# EAGLE board videoPlayer_v1.0 (EAGLE 9.7.0)
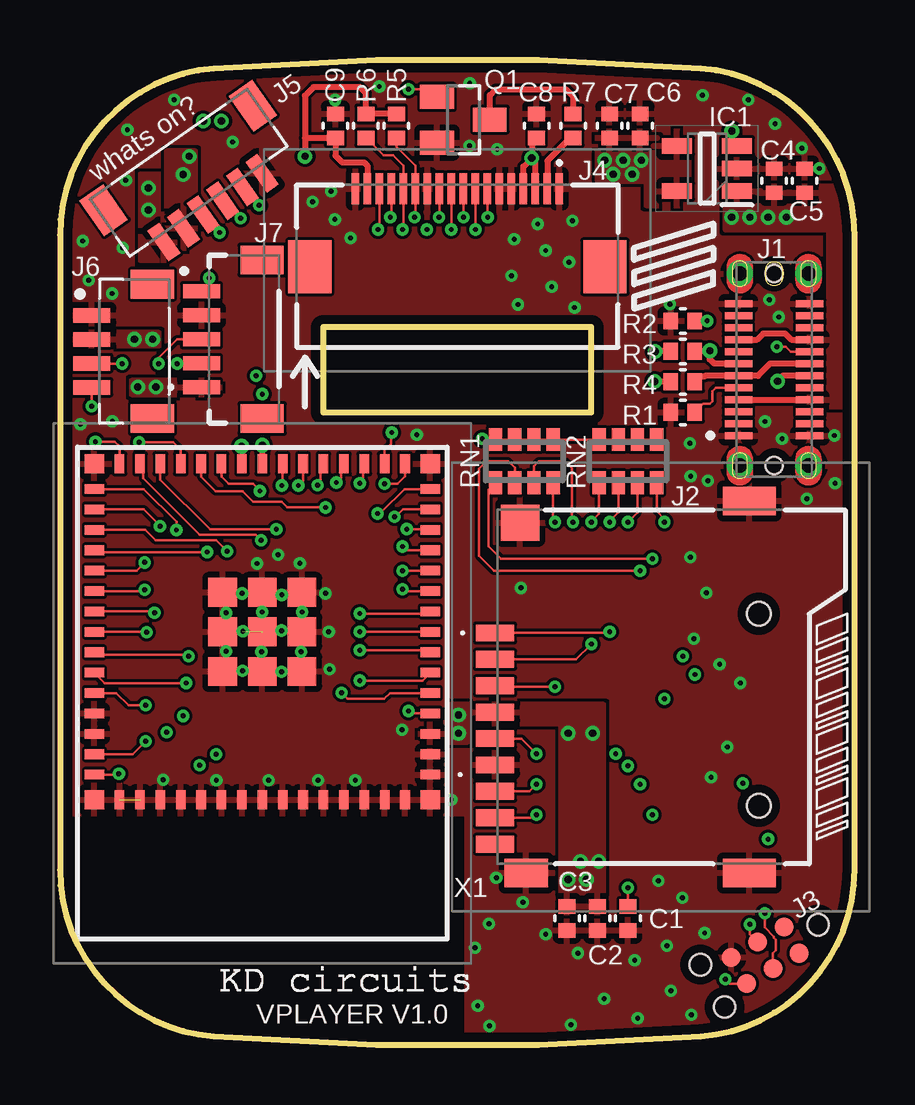
[diagram p0: board, top side]
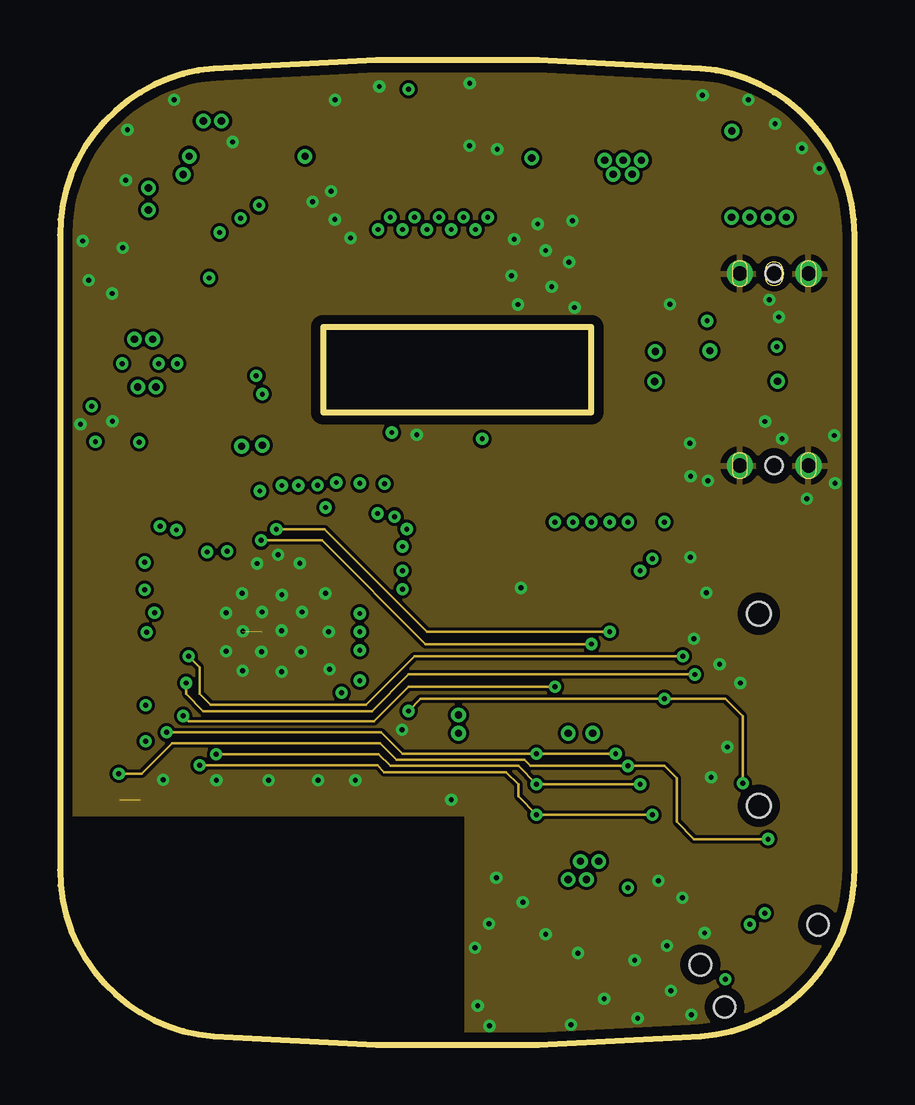
[diagram p1: board, inner layer Route2]
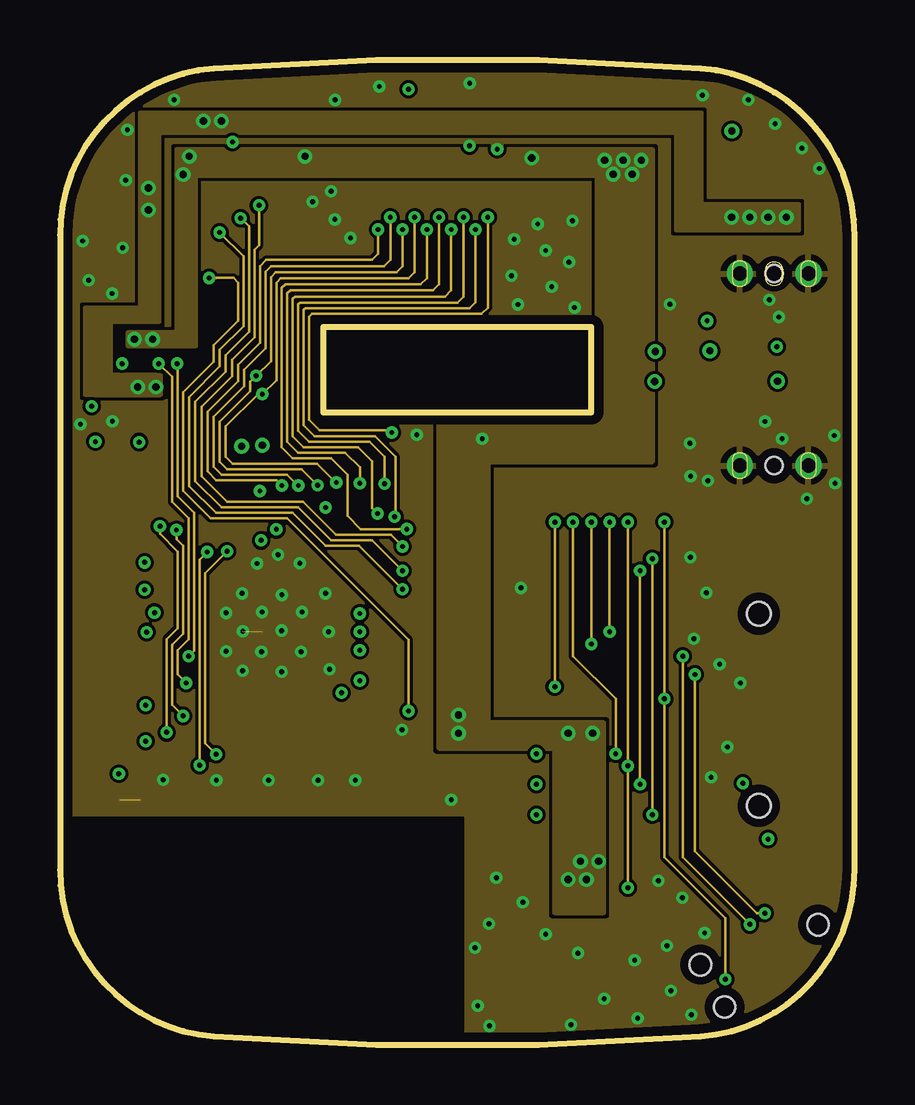
[diagram p2: board, inner layer Route15]
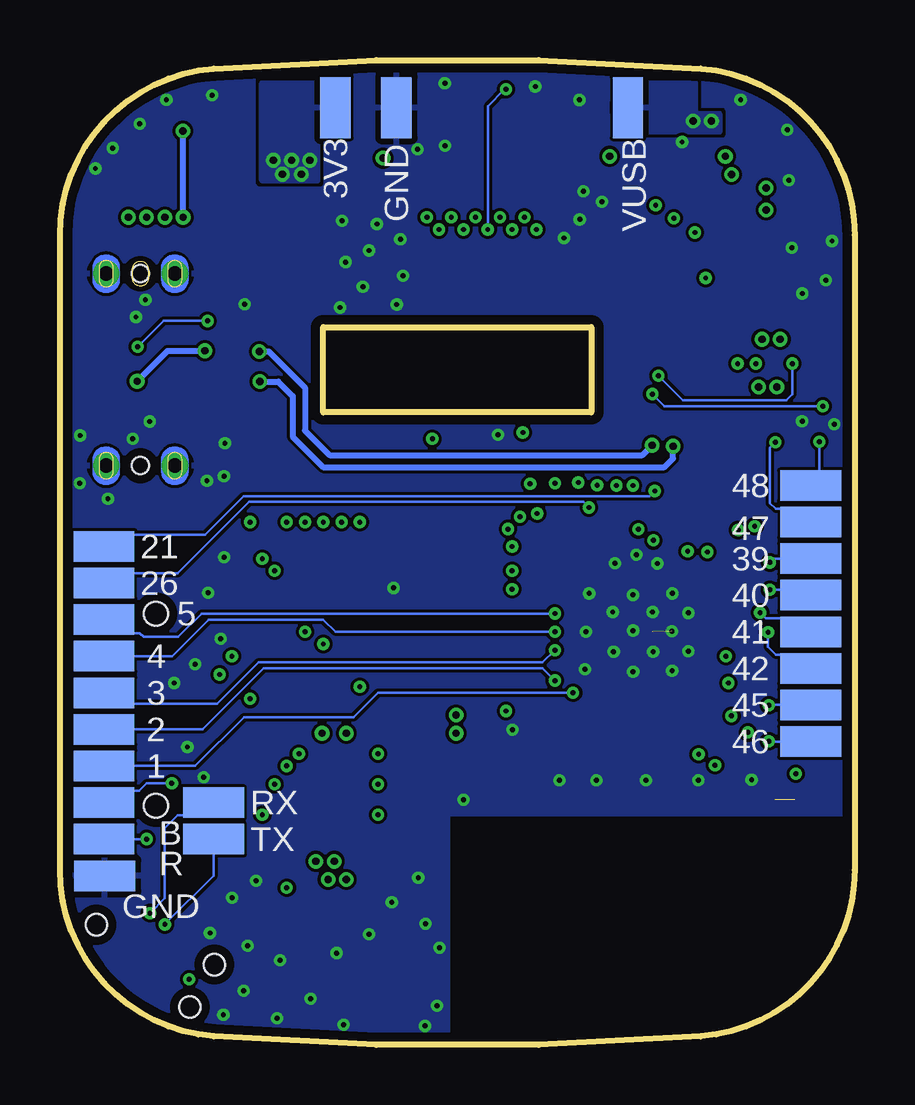
[diagram p3: board, bottom side, seen from below]

Size 33.13 x 41.04 mm. Coordinates in mm from the lower left corner, seen from the top.
Outline: 0,7.3 arc85 6.42,0.36 arc9 26.71,0.36 arc85 33.13,7.3 33.13,33.74 arc85 26.71,40.69 arc9 6.42,40.69 arc85 0,33.74 0,7.3
Copper layers (1+2*15+16): Top 0.035mm / dielectric 0.1mm / Route2 0.035mm / dielectric 0.68mm / Route15 0.014mm / dielectric 0.1mm / Bottom 0.035mm
Design rules "4layer_4mil_0.12mmhole *": minimum track width 4mil, minimum drill 0.2mm, track to track 5mil, track to pad 5mil, pad to pad 5mil, via to via 5mil, smd to smd 0mil, copper to edge 15mil, drill to drill 4mil, minimum pad ring 6mil, minimum via ring 6mil, stop-mask expansion 4mil, vias tented up to drill 100mil, thermal gap 10mil

## Footprints (pad centres in the part's own frame; a part is rotated, then mirrored left to right if it is on the bottom)
0402 = smd 0.6 x 0.7: 1 -0.5,0; 2 0.5,0
SOT94P280X100-5N = smd 1.25 x 0.65: 1 -1.25,0.94; 2 -1.25,0; 3 -1.25,-0.94; 4 1.25,-0.94; 5 1.25,0.94
GCT_USB4160-03-0170-C_REVA2 = smd 0.3 x 1.15: A1 -2.75,1.485; A2 -2.25,1.485; A3 -1.75,1.485; A4 -1.25,1.485; A5 -0.75,1.485; A6 -0.25,1.485; A7 0.25,1.485; A8 0.75,1.485; A9 1.25,1.485; A10 1.75,1.485; A11 2.25,1.485; A12 2.75,1.485; B1 2.75,-1.485; B2 2.25,-1.485; B3 1.75,-1.485; B4 1.25,-1.485; B5 0.75,-1.485; B6 0.25,-1.485; B7 -0.25,-1.485; B8 -0.75,-1.485; B9 -1.25,-1.485; B10 -1.75,-1.485; B11 -2.25,-1.485; B12 -2.75,-1.485 | drill 0.6 pad 1.1: S1 -4,1.43; S2 4,1.43; S3 -4,-1.43; S4 4,-1.43 | hole 0.71: -4,0; 4,0
MSD4A = smd 0.7 x 1.6: 1 2.25,6.9; 2 1.15,6.9; 3 0.05,6.9; 4 -1.05,6.9; 5 -2.15,6.9; 6 -3.25,6.9; 7 -4.35,6.9; 8 -5.45,6.9; CD1 -6.55,6.9 | smd 1.5 x 1.6: G1 6.85,5.85 | smd 1.2 x 2.2: G2 7.75,-3.7; G3 -7.75,-3.7 | smd 1.2 x 1.8: G4 -7.75,5.6 | hole 1: 3.05,-4.1; -4.95,-4.1
TC2030-MCP-NL = smd 0.787 x 0.787: 1 1.27,-0.635; 2 1.27,0.635; 3 2.54,-0.635; 4 2.54,0.635; 5 3.81,-0.635; 6 3.81,0.635 | hole 0.889: 0,0; 5.08,-1.016; 5.08,1.016
FFC2B3518G = smd 0.3 x 1.3: 1 4.25,3.22; 2 3.75,3.22; 3 3.25,3.22; 4 2.75,3.22; 5 2.25,3.22; 6 1.75,3.22; 7 1.25,3.22; 8 0.75,3.22; 9 0.25,3.22; 10 -0.25,3.22; 11 -0.75,3.22; 12 -1.25,3.22; 13 -1.75,3.22; 14 -2.25,3.22; 15 -2.75,3.22; 16 -3.25,3.22; 17 -3.75,3.22; 18 -4.25,3.22 | smd 1.8 x 2.2: MP1 -6.15,-0.03; MP2 6.15,-0.03
JST_BM06B-SRSS-TB(LF)(SN) = smd 0.6 x 1.55: 1 -2.5,-2.525; 2 -1.5,-2.525; 3 -0.5,-2.525; 4 0.5,-2.525; 5 1.5,-2.525; 6 2.5,-2.525 | smd 1.2 x 1.8: S1 -3.8,0; S2 3.8,0
CONN_BM04B-SRSS-TBT(LF)(SN) = smd 0.6 x 1.55: 1 -1.5,0; 2 -0.5,0; 3 0.5,0; 4 1.5,0 | smd 1.2 x 1.8: SH1 -2.8,2.525; SH2 2.8,2.525
BM05BSRSSTBTLFSN = smd 0.6 x 1.55: 1 -2,1.775; 2 -1,1.775; 3 0,1.775; 4 1,1.775; 5 2,1.775 | smd 1.2 x 1.8: MP1 -3.3,-0.75; MP2 3.3,-0.75
SMD1,27-2,54 = smd 1.27 x 2.54: 1 0,0
SOT-23-3 = smd 1 x 1.4: 1 -0.95,-1.1; 2 0.95,-1.1; 3 0,1.1
CAY-16-F4 = smd 0.95 x 0.55: 1 -0.9,-1.2; 2 -0.9,-0.4; 3 -0.9,0.4; 4 -0.9,1.2; 5 0.9,-1.2; 6 0.9,-0.4; 7 0.9,0.4; 8 0.9,1.2
ESP32S3MINI1N8 = smd 0.8 x 0.4: 1 -7,5.95; 2 -7,5.1; 3 -7,4.25; 4 -7,3.4; 5 -7,2.55; 6 -7,1.7; 7 -7,0.85; 8 -7,0; 9 -7,-0.85; 10 -7,-1.7; 11 -7,-2.55; 12 -7,-3.4; 13 -7,-4.25; 14 -7,-5.1; 15 -7,-5.95; 31 7,-5.95; 32 7,-5.1; 33 7,-4.25; 34 7,-3.4; 35 7,-2.55; 36 7,-1.7; 37 7,-0.85; 38 7,0; 39 7,0.85; 40 7,1.7; 41 7,2.55; 42 7,3.4; 43 7,4.25; 44 7,5.1; 45 7,5.95 | smd 0.4 x 0.8: 16 -5.95,-7; 17 -5.1,-7; 18 -4.25,-7; 19 -3.4,-7; 20 -2.55,-7; 21 -1.7,-7; 22 -0.85,-7; 23 0,-7; 24 0.85,-7; 25 1.7,-7; 26 2.55,-7; 27 3.4,-7; 28 4.25,-7; 29 5.1,-7; 30 5.95,-7; 46 5.95,7; 47 5.1,7; 48 4.25,7; 49 3.4,7; 50 2.55,7; 51 1.7,7; 52 0.85,7; 53 0,7; 54 -0.85,7; 55 -1.7,7; 56 -2.55,7; 57 -3.4,7; 58 -4.25,7; 59 -5.1,7; 60 -5.95,7 | smd 1.2 x 1.2: 61 0,0; 66 -1.65,1.65; 67 -1.65,0; 68 -1.65,-1.65; 69 0,-1.65; 70 1.65,-1.65; 71 1.65,0; 72 1.65,1.65; 73 0,1.65 | smd 0.8 x 0.8: 62 -7,7; 63 -7,-7; 64 7,-7; 65 7,7

## Placement (x,y rotation side)
C1  100nF  [0402]  23.68,5.28 90 top
C2  10uF  [0402]  22.41,5.28 90 top
C3  22uF  [0402]  21.14,5.28 90 top
C4  10uF  [0402]  29.77,36.01 270 top
C5  100nF  [0402]  31.04,36.01 270 top
C6  10uF  [0402]  24.19,38.3 270 top
C7  100nF  [0402]  22.91,38.3 270 top
C8  10uF  [0402]  19.87,38.3 270 top
C9  10uF  [0402]  11.49,38.3 270 top
IC1  RT9080-33GJ5  [SOT94P280X100-5N]  26.98,36.52 180 top
J1  USB4160-03-0170-C  [GCT_USB4160-03-0170-C_REVA2]  29.77,28.14 90 top
J2  MSD-4-A  [MSD4A]  25.04,14.92 90 top
J3  [TC2030-MCP-NL]  31.6,5.01 210 top
J4  FFC2B35-18-G  [FFC2B3518G]  16.57,32.46 0 top
J5  BM06B-SRSS-TB  [JST_BM06B-SRSS-TB(LF)(SN)]  4.93,36.96 35 top
J6  BM04B-SRSS-TB  [CONN_BM04B-SRSS-TBT(LF)(SN)]  1.33,28.9 270 top
J7  BM05B-SRSS-TBT  [BM05BSRSSTBTLFSN]  7.68,29.41 90 top
PAD1  [SMD1,27-2,54]  31.3,11.63 90 bottom
PAD2  [SMD1,27-2,54]  31.3,13.15 90 bottom
PAD3  [SMD1,27-2,54]  31.3,14.68 270 bottom
PAD4  [SMD1,27-2,54]  31.3,16.2 270 bottom
PAD5  [SMD1,27-2,54]  31.3,17.72 270 bottom
PAD6  [SMD1,27-2,54]  31.3,20.77 270 bottom
PAD7  [SMD1,27-2,54]  31.3,19.25 270 bottom
PAD8  [SMD1,27-2,54]  1.83,20.26 270 bottom
PAD9  [SMD1,27-2,54]  1.83,18.74 270 bottom
PAD10  [SMD1,27-2,54]  1.83,17.22 270 bottom
PAD11  [SMD1,27-2,54]  1.83,15.69 270 bottom
PAD12  [SMD1,27-2,54]  1.83,14.17 270 bottom
PAD13  [SMD1,27-2,54]  1.83,12.64 270 bottom
PAD14  [SMD1,27-2,54]  1.83,21.79 270 bottom
PAD15  [SMD1,27-2,54]  1.83,23.31 270 bottom
PAD16  [SMD1,27-2,54]  19.11,39.06 180 bottom
PAD17  [SMD1,27-2,54]  21.65,39.06 0 bottom
PAD18  [SMD1,27-2,54]  9.45,39.06 0 bottom
PAD19  [SMD1,27-2,54]  31.3,10.1 270 bottom
PAD20  [SMD1,27-2,54]  31.3,8.58 270 bottom
PAD21  [SMD1,27-2,54]  26.73,10.1 270 bottom
PAD22  [SMD1,27-2,54]  26.73,8.58 270 bottom
PAD23  [SMD1,27-2,54]  31.26,7.04 270 bottom
Q1  2N7002K-7  [SOT-23-3]  16.82,38.55 270 top
R1  5.1k  [0402]  25.96,26.36 180 top
R2  5.1k  [0402]  25.96,30.17 180 top
R3  33  [0402]  25.96,28.9 180 top
R4  33  [0402]  25.96,27.63 180 top
R5  10k  [0402]  14.03,38.3 270 top
R6  10k  [0402]  12.76,38.3 270 top
R7  10  [0402]  21.39,38.3 90 top
RN1  10k  [CAY-16-F4]  19.36,24.33 90 top
RN2  10k  [CAY-16-F4]  23.68,24.33 90 top
X1  ESP32-S3-MINI-1-N4R2  [ESP32S3MINI1N8]  8.44,17.22 180 top

## Library data of the parts
C1 C5 C7 = trigBoardV8; DESCRIPTION: CAP CER 0.1UF 16V X7R 0402; FOOTPRINT: 0402; MANUFACTURER_PART_NUMBER: CC0402KRX7R7BB104; SUPPLIER: Digikey; SUPPLIER_PART_NUMBER: 311-1338-1-ND
C2 C4 C6 C8 C9 = trigBoardV8; DESCRIPTION: CAP CER 10UF 6.3V X5R 0402; FOOTPRINT: 0402; MANUFACTURER_PART_NUMBER: GRJ155R60J106ME11D; SUPPLIER: Digikey; SUPPLIER_PART_NUMBER: 490-13211-1-ND
C3 = trigBoardV8; DESCRIPTION: CAP CER 22UF 4V X5R 0402; FOOTPRINT: 0402; MANUFACTURER_PART_NUMBER: CM05X5R226M04AH; SUPPLIER: Digikey; SUPPLIER_PART_NUMBER: 478-CM05X5R226M04AHCT-ND
IC1 = trigBoardV8; DESCRIPTION: IC REG LIN 3.3V 600MA TSOT23-5; FOOTPRINT: TSOT23; MANUFACTURER_PART_NUMBER: RT9080-33GJ5; SUPPLIER: Digikey; SUPPLIER_PART_NUMBER: 1028-1509-1-ND
J1 = trigBoardV8; DESCRIPTION: USB 3.2 TYPE-C RECPT VERT SMT 1.; FOOTPRINT: SMD; MANUFACTURER_PART_NUMBER: USB4160-03-0170-C; SUPPLIER: Digikey; SUPPLIER_PART_NUMBER: 2073-USB4160-03-0170-CCT-ND
J2 = trigBoardV8; DESCRIPTION: MICRO SD CARD CONNECTOR, 9 POSIT; FOOTPRINT: SMD; MANUFACTURER_PART_NUMBER: MSD-4-A; SUPPLIER: Digikry; SUPPLIER_PART_NUMBER: 2223-MSD-4-ACT-ND
J3 PAD1-PAD23 = trigBoardV8
J4 = trigBoardV8; DESCRIPTION: CONN FFC BOTTOM 18POS 0.5MM R/A; FOOTPRINT: SMD; MANUFACTURER_PART_NUMBER: FFC2B35-18-G; SUPPLIER: DIGIKEY; SUPPLIER_PART_NUMBER: 2073-FFC2B35-18-GCT-ND
J5 = trigBoardV8; DESCRIPTION: CONN HEADER SMD 6POS 1MM; FOOTPRINT: SMD; MANUFACTURER_PART_NUMBER: BM06B-SRSS-TB; SUPPLIER: Digikey; SUPPLIER_PART_NUMBER: 455-BM06B-SRSS-TBCT-ND
J6 = trigBoardV8; DESCRIPTION: CONN HEADER SMD 4POS 1MM; FOOTPRINT: SMD; MANUFACTURER_PART_NUMBER: BM04B-SRSS-TB; SUPPLIER: Digikey; SUPPLIER_PART_NUMBER: 455-BM04B-SRSS-TBCT-ND
J7 = trigBoardV8; DESCRIPTION: CONN HEADER SMD 5POS 1MM; FOOTPRINT: SMT; MANUFACTURER_PART_NUMBER: BM05B-SRSS-TBT(LF)(SN); SUPPLIER: Digikey; SUPPLIER_PART_NUMBER: 455-2958-1-ND
Q1 = trigBoardV8; DESCRIPTION: MOSFET N-CH 60V 0.38A SOT23-3; FOOTPRINT: SOT23; MANUFACTURER_PART_NUMBER: 2N7002K-7; SUPPLIER: Digikey; SUPPLIER_PART_NUMBER: 2N7002K-7DICT-ND
R1 R2 = trigBoardV8; DESCRIPTION: RES 5.1K OHM 1% 1/16W 0402; FOOTPRINT: 0402; MANUFACTURER_PART_NUMBER: RC0402FR-075K1L; SUPPLIER: Digikey; SUPPLIER_PART_NUMBER: 311-5.10KLRCT-ND
R3 R4 = trigBoardV8; DESCRIPTION: RES 33 OHM 1% 1/16W 0402; FOOTPRINT: 0402; MANUFACTURER_PART_NUMBER: RC0402FR-0733RL; SUPPLIER: Digikey; SUPPLIER_PART_NUMBER: 311-33.0LRCT-ND
R5 R6 = trigBoardV8; DESCRIPTION: RES SMD 10K OHM 1% 1/16W 0402; FOOTPRINT: 0402; MANUFACTURER_PART_NUMBER: RC1005F103CS; SUPPLIER: Digikiey; SUPPLIER_PART_NUMBER: 1276-3431-1-ND
R7 = trigBoardV8; DESCRIPTION: RES SMD 10 OHM 1% 1/16W 0402; FOOTPRINT: 0402; MANUFACTURER_PART_NUMBER: CR0402-FX-10R0GLF; SUPPLIER: Digikey; SUPPLIER_PART_NUMBER: CR0402-FX-10R0GLFCT-ND
RN1 RN2 = trigBoardV8; DESCRIPTION: RES ARRAY 4 RES 10K OHM 1206; FOOTPRINT: 1206; MANUFACTURER_PART_NUMBER: CAY16-1002F4LF; SUPPLIER: Digikey; SUPPLIER_PART_NUMBER: CAY16-1002F4LFCT-ND
X1 = trigBoardV8; DESCRIPTION: Blluetooth LE MCU Mod; FOOTPRINT: SMD; MANUFACTURER_PART_NUMBER: ESP32-S3-MINI-1-N4R2; SUPPLIER: Digikey; SUPPLIER_PART_NUMBER: 1965-ESP32-S3-MINI-1-N4R2CT-ND

## Nets
2: J3.2
3V3: C2.2 C3.2 C6.2 C7.2 C8.2 C9.2 IC1.4 IC1.5 J2.4 J4.3 J4.4 J4.17 J5.2 J6.2 PAD17.1 R5.1 R6.1 RN1.5 RN1.6 RN1.7 RN1.8 RN2.5 RN2.6 RN2.7 RN2.8 X1.3
BOOT: J3.6 J7.5 PAD19.1 RN2.1 X1.4
GND: C1.1 C2.1 C3.1 C4.1 C5.1 C6.1 C7.1 C8.1 C9.1 IC1.2 J1.A1 J1.A12 J1.B1 J1.B12 J1.S1 J1.S2 J1.S3 J1.S4 J2.6 J2.G1 J2.G2 J2.G3 J2.G4 J3.5 J4.1 J4.5 J4.6 J4.12 J4.18 J5.6 J6.1 J7.4 PAD16.1 PAD23.1 Q1.2 R1.2 R2.2 X1.1 X1.2 X1.42 X1.43 X1.46 X1.47 X1.48 X1.49 X1.50 X1.51 X1.52 X1.53 X1.54 X1.55 X1.56 X1.57 X1.58 X1.59 X1.60 X1.61 X1.62 X1.63 X1.64 X1.65 X1.66 X1.67 X1.68 X1.69 X1.70 X1.71 X1.72 X1.73
I2C_SCL: J4.13 J6.4 R5.2 X1.19
I2C_SDA: J4.14 J6.3 R6.2 X1.20
I2S_BCLK: J5.3 X1.10
I2S_DOUT: J5.5 X1.12
I2S_LRC: J5.4 X1.11
IO1: PAD1.1 X1.5
IO2: PAD2.1 X1.6
IO3: PAD3.1 X1.7
IO4: PAD4.1 X1.8
IO5: PAD5.1 X1.9
IO21: PAD6.1 X1.25
IO26: PAD7.1 X1.26
IO39: PAD8.1 X1.35
IO40: PAD9.1 X1.36
IO41: PAD10.1 X1.37
IO42: PAD11.1 X1.38
IO45: PAD12.1 X1.41
IO46: PAD13.1 X1.44
IO47: PAD14.1 X1.27
IO48: PAD15.1 X1.30
LCD_CS: J4.8 X1.14
LCD_DC: J4.7 X1.17
LCD_LIGHT: Q1.1 X1.13
LCD_MOSI: J4.10 X1.15
LCD_RESET: J4.11 X1.18
LCD_SCK: J4.9 X1.16
N$1: R3.2 X1.23
N$3: R4.2 X1.24
N$4: Q1.3 R7.2
N$5: J4.2 R7.1
N$12: J1.B5 R2.1
N$13: J1.A5 R1.1
RESET: C1.2 PAD20.1 RN2.2 X1.45
SD_CLK: J2.5 RN1.2 X1.32
SD_CMD: J2.3 RN1.1 X1.31
SD_D0: J2.7 RN1.3 X1.33
SD_D1: J2.8 RN1.4 X1.34
SD_D2: J2.1 RN2.3 X1.28
SD_D3: J2.2 RN2.4 X1.29
TOUCH_INT: J4.16 X1.22
TOUCH_RESET: J4.15 X1.21
UART_RX: J3.4 J7.3 PAD21.1 X1.40
UART_TX: J3.3 J7.2 PAD22.1 X1.39
USB_N: J1.A7 J1.B7 R3.1
USB_P: J1.A6 J1.B6 R4.1
VUSB: C4.2 C5.2 IC1.1 IC1.3 J1.A4 J1.A9 J1.B4 J1.B9 J5.1 J7.1 PAD18.1

## Tracks (layer width: path | path; a pad name or v marks a point on that pad's centre or on a via)
3V3  (via drill 0.2, 0.3)
  Top 0.102: RN2.5 RN2.6 RN2.7 RN2.8 RN1.5 RN1.6 RN1.7 RN1.8 17.61,25.23 v17.61,25.25
  Top 0.254: R5.1 R6.1 12.76,39.66 12.5,39.91 10.57,39.91 10.22,39.55 10.22,37.79 | 10.22,37.79 v10.22,37.03 | 10.22,37.79 C9.2 11.49,37.05 11.76,36.77 12.68,36.77 12.82,36.64 J4.17 | J4.3 19.82,36.8 v19.66,36.95 | C8.2 19.68,37.61 19.68,36.96 v19.66,36.95 | J4.4 19.32,36.6 v19.66,36.95
  other vias: 24.24,36.86 23.47,36.86 22.71,36.86 23.07,36.28 23.85,36.28 3.87,29.41 3.1,29.41 5.39,37.03 5.14,36.27 16.62,12.99 16.62,13.75 21.19,12.99 22.2,12.99 21.19,6.89 21.95,6.89 22.46,7.65 21.7,7.65
  pour Top: 24.42,35.96 24.44,35.91 24.44,35 26.22,35 26.22,38.04 22.41,38.04 22.41,36.01 24.34,36.01 24.38,35.99
  pour Route15: 20.61,12.33 20.63,12.29 20.63,5.53 22.66,5.53 22.66,13.41 17.94,13.41 17.89,13.42 17.85,13.46 17.84,13.51 17.84,24.23 17.85,24.27 17.89,24.31 17.94,24.33 24.69,24.33 24.69,37.28 4.88,37.28 4.88,29.76 4.86,29.72 4.83,29.68 4.78,29.66 2.85,29.66 2.85,29.15 5.64,29.15 5.64,36.16 5.66,36.21 5.7,36.25 5.74,36.27 22.31,36.27 22.35,36.25 22.39,36.21 22.41,36.16 22.41,25.95 22.39,25.91 22.35,25.87 22.31,25.85 15.8,25.85 15.8,12.39 20.53,12.39 20.57,12.37
  pour Top: 0.56,29.15 4.12,29.15 4.12,29.67 0.56,29.67
  pour Top: 4.45,33.22 5.64,33.22 5.64,37.23 4.45,37.23
  pour Top: 20.86,13.35 20.88,13.3 20.88,5.53 22.66,5.53 22.66,14.17 16.27,14.17 16.27,13.51 16.25,13.46 16.22,13.42 16.17,13.41 15.04,13.41 15.04,12.64 17.01,12.64 17.01,13.3 17.03,13.35 17.06,13.39 17.11,13.41 20.78,13.41 20.83,13.39
  pour Bottom: 22.39,37.99 22.41,37.94 22.41,36.01 24.69,36.01 24.69,40.08 21.39,40.08 21.39,38.04 22.31,38.04 22.35,38.02
BOOT  (via drill 0.2)
  Top 0.102: J7.5 6.21,31.72 v6.21,31.96 | X1.4 14.63,13.82 v14.53,13.91 | J3.6 27.93,2.55 v27.74,2.74 | v25.2,21.79 25.2,21.91 24.88,22.23 RN2.1
  Route2 0.102: v14.53,13.91 15.04,14.42 v25.2,14.42 27.74,14.42 28.47,13.7 v28.47,10.9
  Route15 0.102: v6.21,31.96 7.23,31.96 7.42,31.77 7.42,30.17 6.41,29.15 6.41,28.47 5.14,27.2 5.14,23.08 6.28,21.94 9.48,21.94 14.53,16.89 v14.53,13.91 | v27.74,2.74 27.74,5.28 25.2,7.82 v25.2,14.42 v25.2,21.79
  Bottom 0.102: PAD19.1 30.8,10.6 29.82,10.6 29.52,10.9 28.54,10.9 28.5,10.87 v28.47,10.9
GND  (via drill 0.2)  (2 unrouted)
  other vias: 11.47,39.38 17.09,40.08 10.53,35.14 11.46,34.4 12.12,33.62 18.94,33.57 17.07,37.47 18.23,37.32 19.92,34.21 21.37,34.35 20.25,33.1 18.83,32.05 20.5,31.59 21.23,32.62 19.09,30.86 21.45,30.73 26.79,39.57 28.69,39.39 29.81,38.39 30.93,37.37 31.65,36.52 25.43,30.87 29.57,31.05 29.96,30.33 29.39,25.98 30.1,25.25 26.26,25.08 26.29,23.69 27,23.51 32.29,25.39 32.31,23.4 31.13,22.77 26.28,20.33 26.95,18.84 26.43,16.92 27.5,15.87 28.36,15.08 19.22,19.04 14.88,25.43 11.07,18.82 11.21,17.22 11.24,15.65 9.24,15.55 9.24,17.27 9.25,18.75 7.6,18.82 7.62,17.24 7.61,15.59 8.4,16.39 6.93,16.4 6.93,18 10.09,18.04 8.42,18.04 10.05,16.39 8.22,20.06 10,20.07 9.1,20.43 4.3,11.06 6.52,11.03 8.7,11.03 10.76,11.03 12.31,11.03 16.31,10.22 14.27,13.14 18.19,6.97 19.3,5.95 24.95,6.84 17.89,5.05 20.25,4.62 17.3,4.05 17.42,1.63 17.91,0.79 21.3,0.85 22.69,1.92 21.59,3.83 23.96,3.52 24.08,1.11 25.47,2.25 26.32,1.26 25.3,4.13 26.88,4.67 25.95,6.13 27.14,11.16 27.82,12.41 0.86,25.86 2.19,25.99 2.18,31.31 1.2,31.86 0.94,33.5 2.62,33.22 2.75,36.04 2.81,38.13 4.75,39.39 7.19,37.62 13.31,39.94 11.31,35.57
  pour Top (rank 3): 16.92,9.56 16.93,9.53 16.93,-0.56 34.34,-0.56 34.34,42.62 -1.21,42.62 -1.21,9.6 16.87,9.6 16.9,9.58
  pour Route2 (rank 3): 16.92,9.56 16.93,9.53 16.93,-0.56 34.34,-0.56 34.34,42.62 -1.21,42.62 -1.21,9.6 16.87,9.6 16.9,9.58
  pour Bottom (rank 3): 16.92,9.56 16.93,9.53 16.93,-0.56 34.34,-0.56 34.34,42.62 -1.21,42.62 -1.21,9.6 16.87,9.6 16.9,9.58
  pour Route15 (rank 3): 16.92,9.56 16.93,9.53 16.93,-0.56 34.34,-0.56 34.34,42.62 -1.21,42.62 -1.21,9.6 16.87,9.6 16.9,9.58
I2C_SCL  (via drill 0.2)
  Top 0.102: R5.2 14.03,37.42 14.82,36.63 J4.13 14.82,34.52 v14.79,34.49 | v1.33,26.61 J6.4 | v11.52,23.44 11.71,23.63 11.71,24.09 X1.19
  Route15 0.102: v14.79,34.49 14.79,32.2 14.53,31.95 9.2,31.95 9.02,31.77 9.02,27.71 v8.44,27.12 8.26,27.12 6.91,25.78 6.91,24.51 7.19,24.23 10.71,24.23 11.5,23.44 v11.52,23.44
  Bottom 0.102: v8.44,27.12 7.93,26.61 v1.33,26.61
I2C_SDA  (via drill 0.2)
  Top 0.102: R6.2 13.49,37.07 13.89,37.07 14.32,36.64 J4.14 14.32,34.02 v14.28,33.98 | v2.6,28.39 J6.3 | v10.74,23.32 10.86,23.45 10.86,24.09 X1.20
  Route15 0.102: v14.28,33.98 14.28,32.46 14.03,32.2 9,32.2 8.79,32 8.79,28.49 v8.18,27.88 7.93,27.63 7.93,27.25 6.66,25.98 6.66,24.3 6.96,24 10.06,24 v10.74,23.32
  Bottom 0.102: v8.18,27.88 7.17,26.87 2.85,26.87 2.6,27.12 v2.6,28.39
I2S_BCLK  (via drill 0.2)
  Top 0.102: J5.3 6.66,33.91 v6.66,33.85 | v14.28,18.99 14.36,18.92 X1.10
  Route15 0.102: v6.66,33.85 7.65,32.86 7.65,29.94 6.67,28.96 6.67,28.27 5.39,26.99 5.39,23.29 6.51,22.17 9.71,22.17 11.08,20.8 12.48,20.8 v14.28,18.99
I2S_DOUT  (via drill 0.2)
  Top 0.102: J5.5 8.3,35.06 v8.3,34.98 | v14.28,20.77 14.44,20.62 X1.12
  Route15 0.102: v8.3,34.98 8.3,33.33 8.11,33.14 8.11,29.48 7.17,28.54 7.17,27.86 5.9,26.59 5.9,23.69 6.96,22.63 10.14,22.63 11.51,21.25 13.8,21.25 v14.28,20.77
I2S_LRC  (via drill 0.2)
  Top 0.102: J5.4 7.52,34.45 v7.54,34.45 | v14.28,19.76 14.29,19.77 X1.11
  Route15 0.102: v14.28,19.76 13.01,21.03 11.31,21.03 9.94,22.4 6.74,22.4 5.64,23.49 5.64,26.79 6.91,28.06 6.91,28.75 7.88,29.71 7.88,34.11 v7.54,34.45
IO1  (via drill 0.2)
  Top 0.102: X1.5 13.76,14.67 13.52,14.42 11.99,14.42 v11.74,14.68
  Bottom 0.102: PAD1.1 27.49,11.63 25.46,13.66 20.88,13.66 19.87,14.68 v11.74,14.68
IO2  (via drill 0.2)
  Top 0.102: X1.6 15.11,15.18 v12.5,15.18
  Bottom 0.102: v12.5,15.18 13.01,15.69 24.64,15.69 27.18,13.15 PAD2.1
IO3  (via drill 0.2)
  Top 0.102: X1.7 15.35,16.45 v12.5,16.45
  Bottom 0.102: v12.5,16.45 13.01,15.95 24.84,15.95 26.57,14.22 30.84,14.22 PAD3.1
IO4  (via drill 0.2)
  Top 0.102: X1.8 v12.5,17.22
  Bottom 0.102: v12.5,17.22 21.65,17.22 22.15,17.72 26.93,17.72 28.45,16.2 PAD4.1
IO5  (via drill 0.2)
  Top 0.102: X1.9 15.35,17.98 v12.5,17.98
  Bottom 0.102: PAD5.1 30.74,17.16 29.8,17.16 29.65,17.01 28.2,17.01 27.23,17.98 v12.5,17.98
IO21  (via drill 0.2)
  Top 0.102: v8.34,23.08 8.04,23.37 7.04,23.37 6.74,23.68 X1.25
  Bottom 0.102: v8.34,23.08 8.34,23.07 8.55,22.85 25.48,22.85 27.08,21.25 30.81,21.25 PAD6.1
IO26  (via drill 0.2)
  Top 0.102: v11.08,22.4 9.48,22.4 9.25,22.63 8.06,22.63 7.61,23.07 6.5,23.07 5.89,23.68 X1.26
  Bottom 0.102: v11.08,22.4 11.31,22.63 25.25,22.63 28.22,19.65 30.89,19.65 PAD7.1
IO39  (via drill 0.2)
  Top 0.102: X1.35 3.19,19.77 v3.54,20.11
  Bottom 0.102: v3.54,20.11 3.38,20.26 PAD8.1
IO40  (via drill 0.2)
  Top 0.102: X1.36 3.48,18.92 v3.54,18.97
  Bottom 0.102: v3.54,18.97 2.06,18.97 PAD9.1
IO41  (via drill 0.2)
  Top 0.102: X1.37 3.89,18.07 v3.94,18.02
  Bottom 0.102: v3.94,18.02 3.71,17.79 2.4,17.79 PAD10.1
IO42  (via drill 0.2)
  Top 0.102: X1.38 3.6,17.22 v3.61,17.2
  Bottom 0.102: v3.61,17.2 3.61,16.59 3.28,16.26 2.4,16.26 PAD11.1
IO45  (via drill 0.2)
  Top 0.102: v3.57,14.15 2.86,14.15 2.35,14.67 X1.41
  Bottom 0.102: PAD12.1 3.56,14.17 v3.57,14.15
IO46  (via drill 0.2)
  Top 0.102: v3.57,12.66 3.03,12.12 X1.44
  Bottom 0.102: PAD13.1 3.56,12.64 v3.57,12.66
IO47  (via drill 0.2)
  Top 0.102: X1.27 5.04,24.79 4.71,25.12 v3.31,25.12
  Bottom 0.102: v3.31,25.12 3.54,24.89 3.54,22.57 3.29,22.33 2.38,22.33 PAD14.1
IO48  (via drill 0.2)
  Top 0.102: X1.30 2.49,24.94 2.29,25.14 v1.48,25.14
  Bottom 0.102: v1.48,25.14 1.48,23.67 PAD15.1
LCD_CS  (via drill 0.2)
  Top 0.102: J4.8 17.33,35.66 v17.33,33.98 | v13.95,22.02 13.99,22.02 14.29,22.32 X1.14
  Route15 0.102: v17.33,33.98 17.33,30.96 17.07,30.7 10.24,30.7 10.16,30.63 10.16,25.83 10.62,25.37 13.14,25.37 13.99,24.52 13.99,22.05 v13.95,22.02
LCD_DC  (via drill 0.2)
  Top 0.102: J4.7 17.82,34.51 v17.84,34.49 | X1.17 13.54,24.77 13.81,25.05 13.81,25.5 v13.83,25.52
  Route15 0.102: v17.84,34.49 17.84,30.73 17.58,30.47 10.52,30.47 10.39,30.35 10.39,26.05 10.83,25.62 13.73,25.62 v13.83,25.52
LCD_LIGHT  (via drill 0.2)
  Top 0.102: Q1.1 15.4,39.82 v14.53,39.82 | X1.13 15.41,21.5 v14.46,21.5
  Route15 0.102: v15.3,33.98 15.3,31.95 15.04,31.69 9.4,31.69 9.25,31.54 9.25,24.91 9.71,24.45 11.31,24.45 11.99,23.77 11.99,22.04 12.54,21.5 v14.46,21.5
  Bottom 0.102: v14.53,39.82 14.6,39.82 15.3,39.12 v15.3,33.98
LCD_MOSI  (via drill 0.2)
  Top 0.102: J4.10 v16.32,33.98 v16.31,33.98 | X1.15 14.36,23.17 13.43,22.23 13.39,22.23 13.3,22.14 v13.24,22.14
  Route15 0.102: v16.31,33.98 16.31,31.44 16.06,31.19 9.81,31.19 9.71,31.08 9.71,25.37 10.16,24.91 12.43,24.91 13.01,24.33 13.01,22.37 v13.24,22.14
LCD_RESET  (via drill 0.2)
  Top 0.102: J4.11 15.82,34.5 v15.8,34.49 | v12.5,23.4 12.63,23.53 12.63,23.95 12.69,24.01 X1.18
  Route15 0.102: v15.8,34.49 15.8,31.69 15.55,31.44 9.61,31.44 9.48,31.31 9.48,25.14 9.94,24.68 11.89,24.68 12.5,24.07 v12.5,23.4
LCD_SCK  (via drill 0.2)
  Top 0.102: J4.9 v16.82,34.49 | v13.53,23.39 14.08,23.39 14.39,23.7 X1.16
  Route15 0.102: v13.53,23.39 13.53,24.52 12.91,25.14 10.39,25.14 9.94,25.6 9.94,30.86 10.01,30.93 16.57,30.93 16.82,31.19 v16.82,34.49
N$1  (via drill 0.3)
  Top 0.254: R3.2 v24.82,28.9 | v8.44,24.99 X1.23
  Bottom 0.254: v24.82,28.9 24.43,28.9 22.91,27.39 22.91,25.6 21.9,24.58 8.84,24.58 v8.44,24.99
N$3  (via drill 0.3)
  Top 0.254: R4.2 24.81,27.63 v24.8,27.64 | v7.57,24.95 7.59,24.94 X1.24
  Bottom 0.254: v24.8,27.64 24.03,27.64 23.42,27.03 23.42,25.34 22.15,24.07 7.93,24.07 7.57,24.43 v7.57,24.95
N$4
  Top 0.254: Q1.3 17.92,39.58 18.17,39.82 21.1,39.82 21.39,39.53 R7.2
N$5
  Top 0.254: R7.1 21.27,37.8 20.32,36.84 J4.2
N$12  (via drill 0.2)
  Top 0.102: J1.B5 30.47,28.89 30.27,29.09 v29.89,29.09 | v26.98,30.17 R2.1
  Bottom 0.102: v29.89,29.09 28.81,30.17 v26.98,30.17
N$13
  Top 0.102: J1.A5 27.33,27.39 27.2,27.25 27.2,26.83 27.09,26.73 26.83,26.73 R1.1
RESET  (via drill 0.2)
  Top 0.102: C1.2 v23.68,6.55 | v2.46,11.3 2.42,11.27 X1.45 | RN2.2 24.08,22.18 v23.68,21.79
  Route2 0.102: v2.46,11.3 3.41,11.3 4.68,12.57 13.34,12.57 14.03,11.88 19.36,11.88 19.61,11.63 v23.68,11.63 25.2,11.63 25.71,11.12 25.71,9.3 26.43,8.58 v29.52,8.58
  Route15 0.102: v23.68,6.55 v23.68,11.63 v23.68,21.79
  Bottom 0.102: PAD20.1 v29.52,8.58
SD_CLK  (via drill 0.2)
  Top 0.102: RN1.2 19.76,24.12 19.97,24.33 21.06,24.33 21.35,24.04 21.35,21.83 v21.39,21.79 | v19.87,12.14 19.24,12.77 J2.5 | v4.17,21.61 4.17,21.64 3.49,22.32 X1.32
  Route2 0.102: v23.17,12.14 v19.87,12.14 14.28,12.14 13.39,13.02 v4.45,13.02
  Route15 0.102: v21.39,21.79 21.39,16.2 23.17,14.42 v23.17,12.14 | v4.17,21.61 4.17,21.29 4.91,20.56 4.91,17.37 4.45,16.91 v4.45,13.02
SD_CMD  (via drill 0.2)
  Top 0.102: RN1.1 20.56,21.86 v20.63,21.79 | v20.63,14.93 18.17,14.93 J2.3 | X1.31 3.49,23.17 4.86,21.8 v4.86,21.46
  Route2 0.102: v20.63,14.93 14.53,14.93 13.09,13.48 5.36,13.48 v5.14,13.71
  Route15 0.102: v20.63,21.79 v20.63,14.93 | v4.86,21.46 4.86,21.08 5.14,20.8 5.14,17.14 4.68,16.68 4.68,14.17 v5.14,13.71
SD_D0  (via drill 0.2)
  Top 0.102: RN1.3 18.96,24.04 18.67,24.33 17.78,24.33 17.47,24.01 17.47,20.38 18.09,19.76 v24.19,19.76 | v19.87,10.87 19.57,10.57 J2.7 | v6.96,20.57 6.51,21.03 3.99,21.03 3.55,21.47 X1.33
  Route2 0.102: v24.19,10.87 v19.87,10.87 19.11,11.63 13.77,11.63 13.29,12.11 v6.51,12.11
  Route15 0.102: v24.19,19.76 v24.19,10.87 | v6.96,20.57 6.05,19.65 6.05,12.57 v6.51,12.11
SD_D1  (via drill 0.2)
  Top 0.102: RN1.4 17.87,23.14 17.87,20.78 18.39,20.26 v24.69,20.26 | v19.87,9.6 19.74,9.47 J2.8 | v6.14,20.54 1.51,20.54 X1.34
  Route2 0.102: v24.69,9.6 v19.87,9.6 19.11,10.36 19.11,10.87 18.6,11.37 13.52,11.37 13.24,11.65 v5.82,11.65
  Route15 0.102: v24.69,20.26 v24.69,9.6 | v6.14,20.54 5.82,20.23 v5.82,11.65
SD_D2  (via drill 0.2)
  Top 0.102: RN2.3 23.28,22.19 22.91,21.83 v22.91,21.79 | v22.91,17.22 22.87,17.17 J2.1 | v9.02,21.48 6.26,21.48 4.19,23.56 X1.28
  Route2 0.102: v22.91,17.22 15.3,17.22 11.03,21.48 v9.02,21.48
  Route15 0.102: v22.91,21.79 v22.91,17.22
SD_D3  (via drill 0.2)
  Top 0.102: RN2.4 22.48,22.13 22.15,21.81 v22.15,21.79 | v22.15,16.71 21.51,16.07 J2.2 | X1.29 3.46,24.09 3.46,23.61 5.82,21.25 8.16,21.25 v8.39,21.03
  Route2 0.102: v22.15,16.71 15.24,16.71 10.93,21.03 v8.39,21.03
  Route15 0.102: v22.15,21.79 v22.15,16.71
TOUCH_INT  (via drill 0.2)
  Top 0.102: J4.16 13.32,34.03 v13.26,33.98 | X1.22 9.29,23.35 v9.25,23.31
  Route15 0.102: v13.26,33.98 13.26,32.96 13.01,32.71 8.59,32.71 8.34,32.46 8.34,29.26 7.42,28.34 7.42,27.65 6.15,26.38 6.15,23.9 6.51,23.54 9.02,23.54 v9.25,23.31
TOUCH_RESET  (via drill 0.2)
  Top 0.102: J4.15 13.82,34.53 v13.77,34.49 | v9.94,23.31 10.14,23.51 X1.21
  Route15 0.102: v13.77,34.49 13.77,32.71 13.52,32.46 8.79,32.46 8.56,32.23 8.56,29.03 7.68,28.14 7.68,27.45 6.41,26.18 6.41,24.1 6.74,23.77 9.48,23.77 v9.94,23.31
UART_RX  (via drill 0.2)
  Top 0.102: J7.3 4.89,29.41 4.12,28.63 v4.12,28.39 | v5.26,15.08 1.87,15.08 X1.40 | J3.4 29.72,3.82 29.85,3.94 29.85,4.39 29.76,4.48 29.76,4.51 29.38,4.9 v29.38,5.49
  Route2 0.102: v26.47,15.44 14.53,15.44 13.01,13.91 5.97,13.91 5.26,14.62 v5.26,15.08
  Route15 0.102: v4.12,28.39 4.68,27.83 4.68,22.63 5.36,21.94 5.36,16.91 4.91,16.45 4.91,15.44 v5.26,15.08 | v29.38,5.49 29.05,5.49 26.47,8.07 v26.47,15.44
  Bottom 0.102: PAD21.1 27.26,9.57 28.22,9.57 28.76,9.03 28.76,6.12 v29.38,5.49
UART_TX  (via drill 0.2)
  Top 0.102: J7.2 5.88,28.39 v4.88,28.39 | v5.36,16.2 5.3,16.26 1.54,16.26 X1.39 | J3.3 28.76,4.62 v28.76,5.02
  Route2 0.102: v5.36,16.2 5.82,15.74 5.82,14.62 6.28,14.17 12.76,14.17 14.79,16.2 v25.96,16.2
  Route15 0.102: v4.88,28.39 4.91,28.37 4.91,22.85 5.59,22.17 5.59,16.43 v5.36,16.2 | v28.76,5.02 25.96,7.82 v25.96,16.2
  Bottom 0.102: v28.76,5.02 26.73,7.06 PAD22.1
USB_N  (via drill 0.3)
  Top 0.254: J1.A7 27.28,28.39 27.09,28.57 v27.09,28.92 27.08,28.91 26.67,28.91 26.65,28.9 R3.1 | J1.B7 30.15,27.89 v29.91,27.65
  Bottom 0.254: v29.91,27.65 28.64,28.92 v27.09,28.92
USB_P
  Top 0.254: R4.1 26.68,27.85 26.87,27.85 26.91,27.89 J1.A6 29.1,27.88 29.6,28.39 J1.B6
VUSB  (via drill 0.3)
  Top 0.254: J1.B4 30.48,29.39 30.23,29.64 29.32,29.64 29.06,29.39 J1.A9 | J1.A4 J1.B9 | v28.01,38.08 28.01,37.46 IC1.3
  Bottom 0.254: v28,34.49 28.01,34.5 v28.01,38.08
  other vias: 30.28,34.49 29.52,34.49 28.76,34.49 4,27.41 3.24,27.41 3.69,34.79 3.69,35.71 5.97,38.5 6.74,38.5
  pour Top: 32.04,29.97 32,29.93 31.96,29.92 31.04,29.92 31.04,26.61 33.58,26.61 33.58,35.76 27.74,35.76 27.74,33.98 31.96,33.98 32,33.96 32.04,33.92 32.06,33.88 32.06,30.02
  pour Route15: 3.34,30.73 3.3,30.7 3.26,30.68 1.07,30.68 1.07,27.12 4.18,27.12 4.18,27.88 2.19,27.88 2.14,27.9 2.11,27.94 2.09,27.99 2.09,30.07 2.11,30.11 2.14,30.15 2.19,30.17 4.12,30.17 4.12,37.94 4.14,37.99 4.17,38.02 4.22,38.04 25.61,38.04 25.65,38.02 25.69,37.99 25.71,37.94 25.71,33.98 30.79,33.98 30.79,35 26.83,35 26.78,35.01 26.74,35.05 26.73,35.1 26.73,38.81 3.36,38.81 3.36,30.78
  pour Top: 2.99,27.12 6.66,27.12 6.66,27.67 2.99,27.67
  pour Top (rank 2): 4.88,32.71 4.88,34.49 4.34,34.49 4.29,34.51 4.25,34.54 4.23,34.59 4.23,36.27 3.36,36.27 3.36,32.71
  pour Bottom: 6.64,38.86 6.6,38.82 6.56,38.81 5.64,38.81 5.64,38.04 9.96,38.04 9.96,40.08 6.66,40.08 6.66,38.91

## Text on the board
tPlace: whats on? | VPLAYER V1.0
bPlace: VUSB | GND | 3V3 | 48 | 47 | 21 | 39 | 40 | 26 | 5 | 41 | 42 | 4 | 3 | 45 | 46 | 2 | 1 | RX | TX | B | R | GND